# EAGLE board smd_circuit_50x50 (EAGLE 5.11)
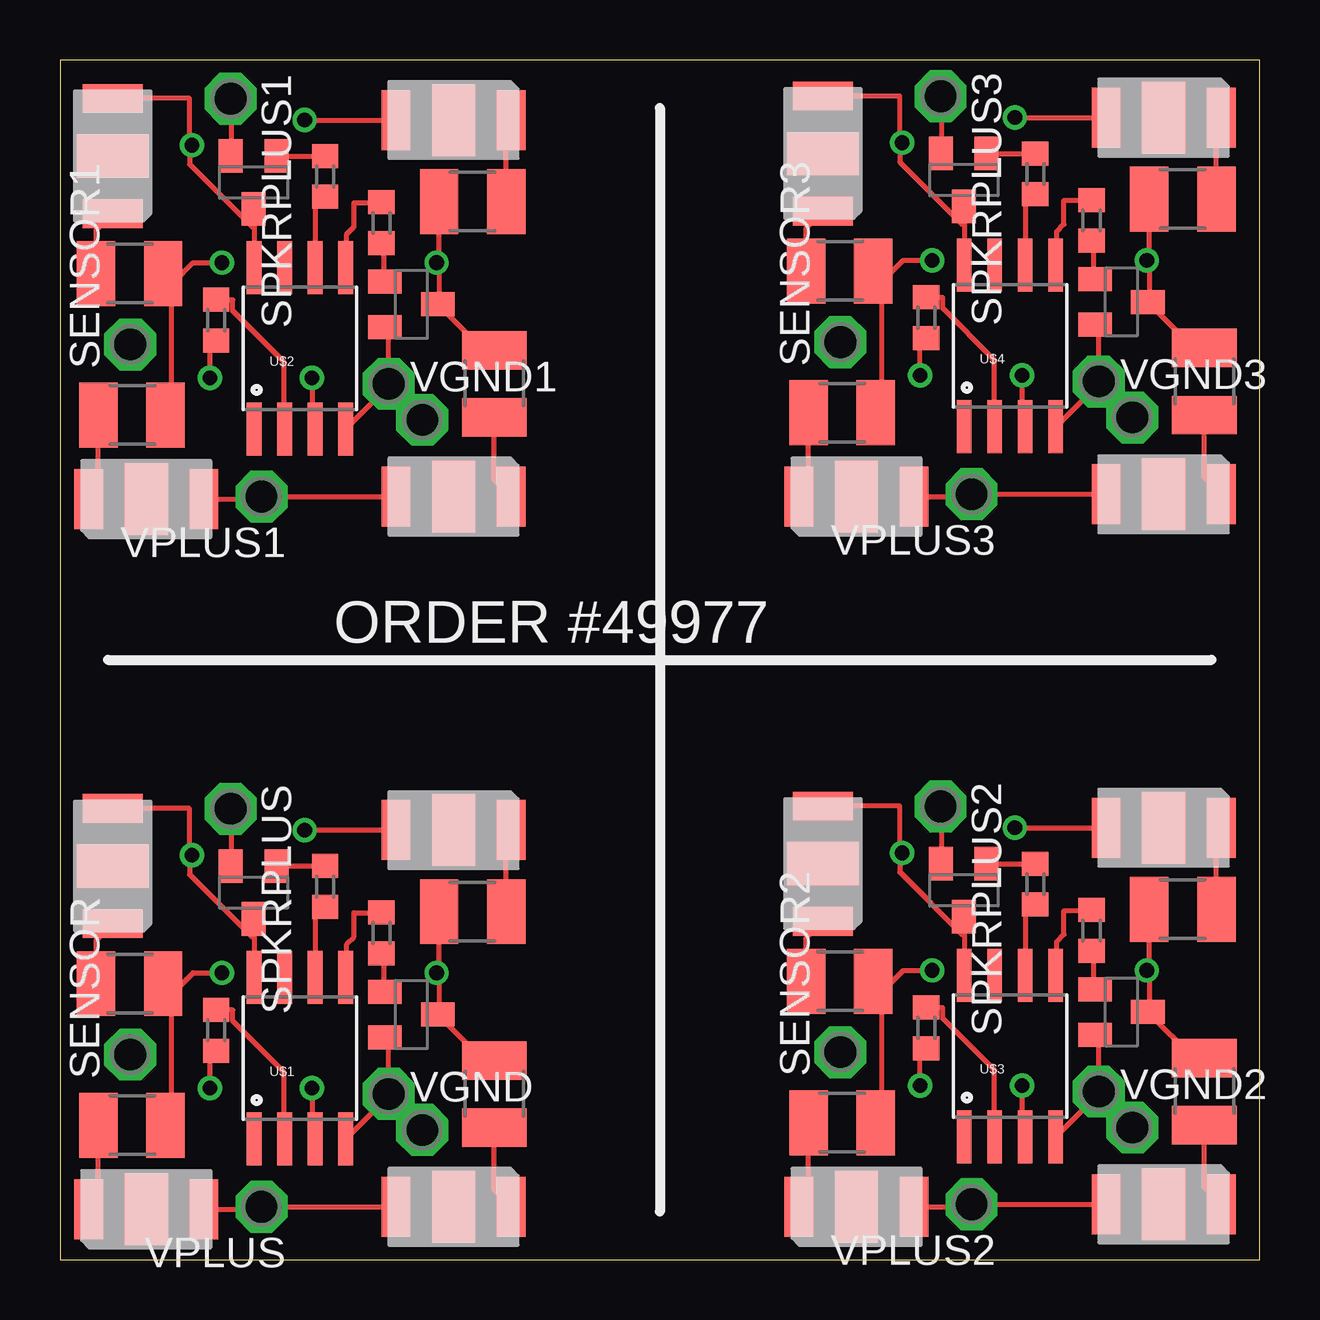
[diagram p0: board, top side]
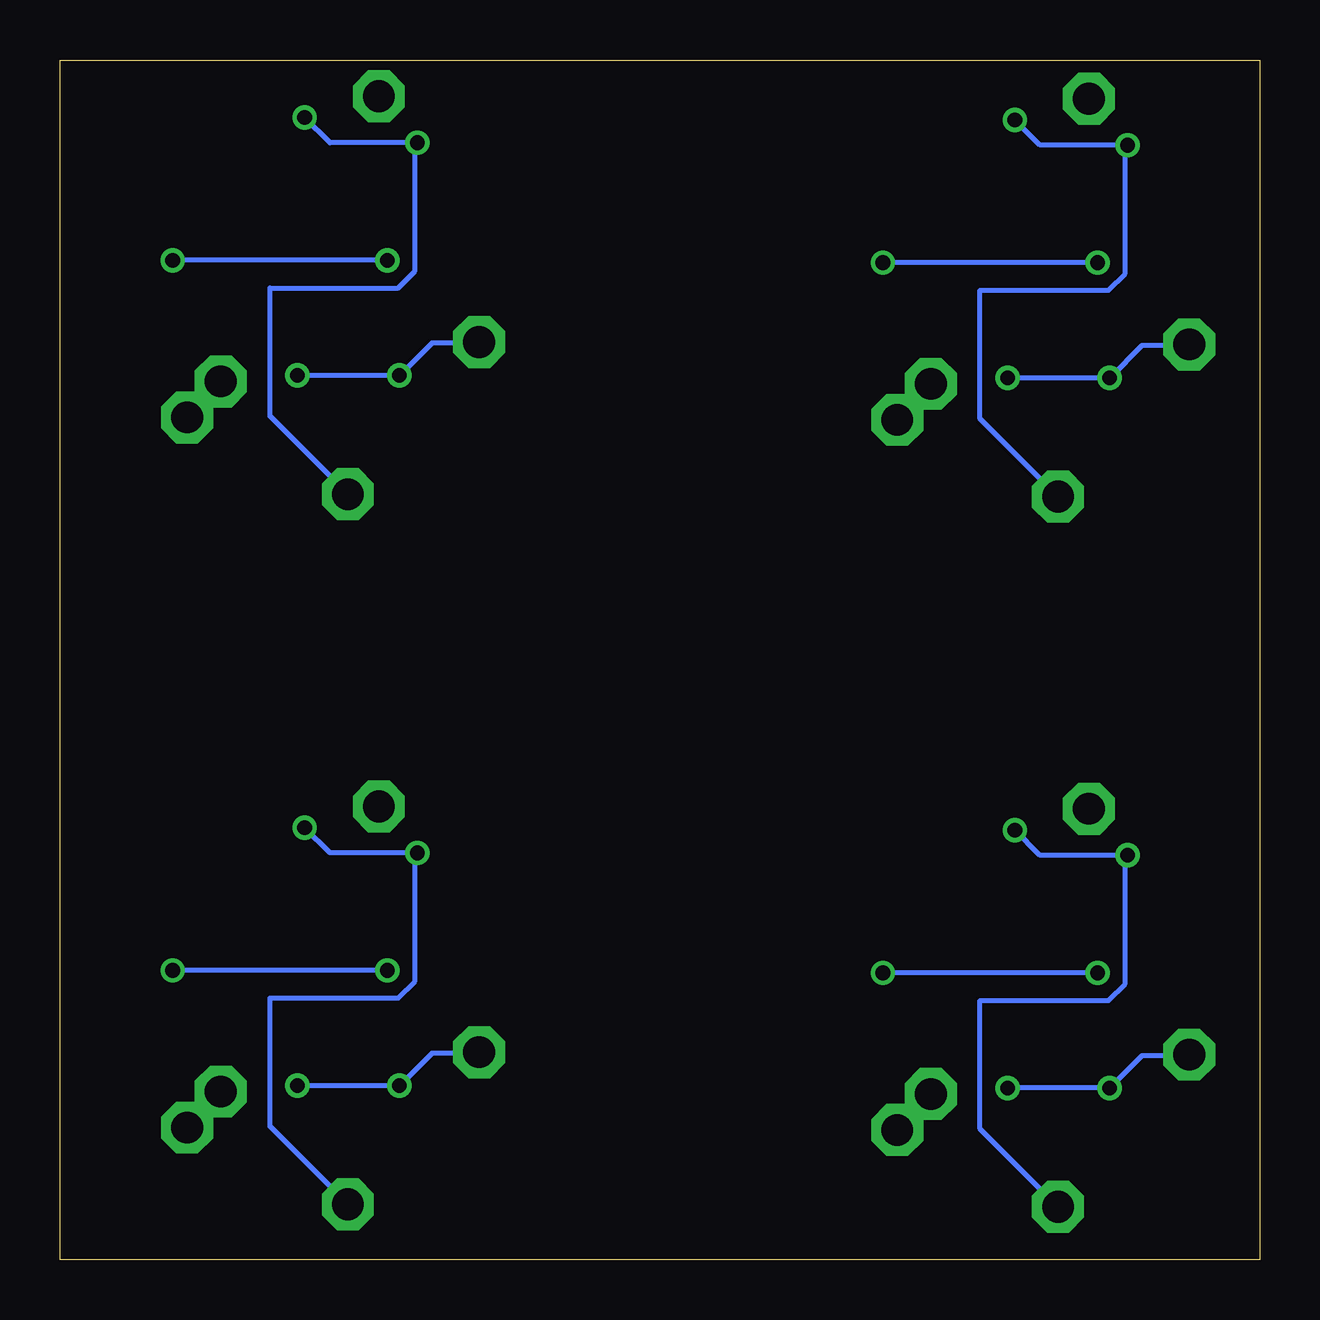
[diagram p1: board, bottom side, seen from below]

Size 50 x 50 mm. Coordinates in mm from the lower left corner, seen from the top.
Outline: 0,0 50,0 50,50 0,50 0,0
Copper layers (1*16): Top 0.035mm / dielectric 1.5mm / Bottom 0.035mm
Design rules "default *": minimum track width 8mil, minimum drill 24mil, track to track 20mil, track to pad 20mil, pad to pad 20mil, via to via 20mil, smd to smd 20mil, copper to edge 7mil, drill to drill 8mil, minimum pad ring 10mil, minimum via ring 8mil, stop-mask expansion 4mil, vias tented up to drill 0mil, thermal gap 10mil

## Footprints (pad centres in the part's own frame; a part is rotated, then mirrored left to right if it is on the bottom)
OPTEK-DURIS5 = smd 2.5 x 1.2: ANODE 0,-2.4; CATHODE 0,2.4 | smd 3 x 1.8: P$5 0,0
R0603 = smd 1 x 1.1: 1 -0.85,0; 2 0.85,0
R1210 = smd 1.6 x 2.7: 1 -1.4,0; 2 1.4,0
P1-13 = drill 1.321 pad 2.159 octagon: TP 0,0
SOT23-BEC = smd 1 x 1.4: B -0.95,-1.1; C 0,1.1; E 0.95,-1.1
SO08-EIAJ = smd 0.61 x 2.21: 1 -1.905,-3.378; 2 -0.635,-3.378; 3 0.635,-3.378; 4 1.905,-3.378; 5 1.905,3.353; 6 0.635,3.353; 7 -0.635,3.353; 8 -1.905,3.353

## Placement (x,y rotation side)
LED1  [OPTEK-DURIS5]  16.4,17.9 270 top
LED2  [OPTEK-DURIS5]  16.4,2.2 270 top
LED3  [OPTEK-DURIS5]  3.6,2.1 90 top
LED4  [OPTEK-DURIS5]  2.2,16.4 180 top
LED5  [OPTEK-DURIS5]  16.4,47.5 270 top
LED6  [OPTEK-DURIS5]  16.4,31.8 270 top
LED7  [OPTEK-DURIS5]  3.6,31.7 90 top
LED8  [OPTEK-DURIS5]  2.2,46 180 top
LED9  [OPTEK-DURIS5]  46,18 270 top
LED10  [OPTEK-DURIS5]  46,2.3 270 top
LED11  [OPTEK-DURIS5]  33.2,2.2 90 top
LED12  [OPTEK-DURIS5]  31.8,16.5 180 top
LED13  [OPTEK-DURIS5]  46,47.6 270 top
LED14  [OPTEK-DURIS5]  46,31.9 270 top
LED15  [OPTEK-DURIS5]  33.2,31.8 90 top
LED16  [OPTEK-DURIS5]  31.8,46.1 180 top
R1  [R0603]  13.4,13.61 270 top
R2  [R0603]  11.05,15.55 90 top
R3  [R0603]  6.51,9.56 90 top
R4  [R1210]  17.2,14.5 180 top
R5  [R1210]  18.1,6.9 90 top
R6  [R1210]  3,5.6 0 top
R7  [R1210]  2.9,11.5 0 top
R8  [R0603]  13.4,43.21 270 top
R9  [R0603]  11.05,45.15 90 top
R10  [R0603]  6.51,39.16 90 top
R11  [R1210]  17.2,44.1 180 top
R12  [R1210]  18.1,36.5 90 top
R13  [R1210]  3,35.2 0 top
R14  [R1210]  2.9,41.1 0 top
R15  [R0603]  43,13.71 270 top
R16  [R0603]  40.65,15.65 90 top
R17  [R0603]  36.11,9.66 90 top
R18  [R1210]  46.8,14.6 180 top
R19  [R1210]  47.7,7 90 top
R20  [R1210]  32.6,5.7 0 top
R21  [R1210]  32.5,11.6 0 top
R22  [R0603]  43,43.31 270 top
R23  [R0603]  40.65,45.25 90 top
R24  [R0603]  36.11,39.26 90 top
R25  [R1210]  46.8,44.2 180 top
R26  [R1210]  47.7,36.6 90 top
R27  [R1210]  32.6,35.3 0 top
R28  [R1210]  32.5,41.2 0 top
SENSOR  PTR1PAD1-13  [P1-13]  2.93,8.54 90 top
SENSOR1  PTR1PAD1-13  [P1-13]  2.93,38.14 90 top
SENSOR2  PTR1PAD1-13  [P1-13]  32.53,8.64 90 top
SENSOR3  PTR1PAD1-13  [P1-13]  32.53,38.24 90 top
SPKRGND  PTR1PAD1-13  [P1-13]  15.1,5.4 0 top
SPKRGND1  PTR1PAD1-13  [P1-13]  15.1,35 0 top
SPKRGND2  PTR1PAD1-13  [P1-13]  44.7,5.5 0 top
SPKRGND3  PTR1PAD1-13  [P1-13]  44.7,35.1 0 top
SPKRPLUS  PTR1PAD1-13  [P1-13]  7.11,18.79 270 top
SPKRPLUS1  PTR1PAD1-13  [P1-13]  7.11,48.39 270 top
SPKRPLUS2  PTR1PAD1-13  [P1-13]  36.71,18.89 270 top
SPKRPLUS3  PTR1PAD1-13  [P1-13]  36.71,48.49 270 top
T1  [SOT23-BEC]  14.64,10.21 270 top
T2  [SOT23-BEC]  8.07,15.3 180 top
T3  [SOT23-BEC]  14.64,39.81 270 top
T4  [SOT23-BEC]  8.07,44.9 180 top
T5  [SOT23-BEC]  44.24,10.31 270 top
T6  [SOT23-BEC]  37.67,15.4 180 top
T7  [SOT23-BEC]  44.24,39.91 270 top
T8  [SOT23-BEC]  37.67,45 180 top
U$1  ATTINY45  [SO08-EIAJ]  10,8.4 0 top
U$2  ATTINY45  [SO08-EIAJ]  10,38 0 top
U$3  ATTINY45  [SO08-EIAJ]  39.6,8.5 0 top
U$4  ATTINY45  [SO08-EIAJ]  39.6,38.1 0 top
VGND  PTR1PAD1-13  [P1-13]  13.7,6.9 0 top
VGND1  PTR1PAD1-13  [P1-13]  13.7,36.5 0 top
VGND2  PTR1PAD1-13  [P1-13]  43.3,7 0 top
VGND3  PTR1PAD1-13  [P1-13]  43.3,36.6 0 top
VPLUS  PTR1PAD1-13  [P1-13]  8.4,2.2 180 top
VPLUS1  PTR1PAD1-13  [P1-13]  8.4,31.8 180 top
VPLUS2  PTR1PAD1-13  [P1-13]  38,2.3 180 top
VPLUS3  PTR1PAD1-13  [P1-13]  38,31.9 180 top

## Library data of the parts
LED1-LED16 T1-T8 = smd_parts
R1-R28 = rcl
SENSOR SENSOR1-SENSOR3 SPKRGND SPKRGND1-SPKRGND3 SPKRPLUS SPKRPLUS1-SPKRPLUS3 VGND VGND1-VGND3 VPLUS VPLUS1-VPLUS3 = testpad
U$1-U$4 = SparkFun

## Nets
+5V: LED1.ANODE LED2.ANODE LED3.ANODE LED4.ANODE T2.C U$1.8 VPLUS.TP
+5V1: LED5.ANODE LED6.ANODE LED7.ANODE LED8.ANODE T4.C U$2.8 VPLUS1.TP
+5V2: LED9.ANODE LED10.ANODE LED11.ANODE LED12.ANODE T6.C U$3.8 VPLUS2.TP
+5V3: LED13.ANODE LED14.ANODE LED15.ANODE LED16.ANODE T8.C U$4.8 VPLUS3.TP
GNDA: SPKRGND.TP T1.E U$1.4 VGND.TP
GNDA1: SPKRGND1.TP T3.E U$2.4 VGND1.TP
GNDA2: SPKRGND2.TP T5.E U$3.4 VGND2.TP
GNDA3: SPKRGND3.TP T7.E U$4.4 VGND3.TP
N$1: R3.2 U$1.2
N$2: R10.2 U$2.2
N$3: R2.1 U$1.6
N$4: R2.2 T2.B
N$5: R4.2 R5.2 R6.2 R7.2 T1.C
N$6: R1.2 T1.B
N$7: R1.1 U$1.5
N$8: SPKRPLUS.TP T2.E
N$9: LED1.CATHODE R4.1
N$10: LED2.CATHODE R5.1
N$11: LED3.CATHODE R6.1
N$12: LED4.CATHODE R7.1
N$13: R9.1 U$2.6
N$14: R8.1 U$2.5
N$15: R9.2 T4.B
N$16: SPKRPLUS1.TP T4.E
N$17: LED5.CATHODE R11.1
N$18: LED6.CATHODE R12.1
N$19: R3.1 SENSOR.TP U$1.3
N$20: LED7.CATHODE R13.1
N$21: LED8.CATHODE R14.1
N$22: R8.2 T3.B
N$23: R11.2 R12.2 R13.2 R14.2 T3.C
N$24: R10.1 SENSOR1.TP U$2.3
N$25: R17.2 U$3.2
N$26: R16.1 U$3.6
N$27: R15.1 U$3.5
N$28: R16.2 T6.B
N$29: SPKRPLUS2.TP T6.E
N$30: LED9.CATHODE R18.1
N$31: LED10.CATHODE R19.1
N$32: LED11.CATHODE R20.1
N$33: LED12.CATHODE R21.1
N$34: R15.2 T5.B
N$35: R18.2 R19.2 R20.2 R21.2 T5.C
N$36: R17.1 SENSOR2.TP U$3.3
N$37: R24.2 U$4.2
N$38: R23.1 U$4.6
N$39: R22.1 U$4.5
N$40: R23.2 T8.B
N$41: SPKRPLUS3.TP T8.E
N$42: LED13.CATHODE R25.1
N$43: LED14.CATHODE R26.1
N$44: LED15.CATHODE R27.1
N$45: LED16.CATHODE R28.1
N$46: R22.2 T7.B
N$47: R25.2 R26.2 R27.2 R28.2 T7.C
N$48: R24.1 SENSOR3.TP U$4.3

## Tracks (layer width: path | path; a pad name or v marks a point on that pad's centre or on a via)
+5V  (via drill 0.61)
  Top 0.203: LED3.ANODE 8.4,2.1 VPLUS.TP LED2.ANODE | 8.1,13.45 8.1,11.8 U$1.8 | 8.1,13.45 8.1,14.15 T2.C | LED4.ANODE 5.4,18.8 5.4,16.85 | 5.4,16.85 5.4,16.05 8,13.45 8.1,13.45 | v10.2,17.9 LED1.ANODE | v5.5,16.85 5.4,16.85
  Bottom 0.203: v10.2,17.9 9.15,16.85 v5.5,16.85 5.6,16.75 5.6,11.5 6.3,10.8 11.65,10.8 11.65,5.45 VPLUS.TP
+5V1  (via drill 0.61)
  Top 0.203: LED7.ANODE 8.4,31.7 VPLUS1.TP LED6.ANODE | 8.1,43.05 8.1,41.4 U$2.8 | 8.1,43.05 8.1,43.75 T4.C | LED8.ANODE 5.4,48.4 5.4,46.45 | 5.4,46.45 5.4,45.65 8,43.05 8.1,43.05 | v10.2,47.5 LED5.ANODE | v5.5,46.45 5.4,46.45
  Bottom 0.203: v10.2,47.5 9.15,46.45 v5.5,46.45 5.6,46.35 5.6,41.1 6.3,40.4 11.65,40.4 11.65,35.05 VPLUS1.TP
+5V2  (via drill 0.61)
  Top 0.203: LED11.ANODE 38,2.2 VPLUS2.TP LED10.ANODE | 37.7,13.55 37.7,11.9 U$3.8 | 37.7,13.55 37.7,14.25 T6.C | LED12.ANODE 35,18.9 35,16.95 | 35,16.95 35,16.15 37.6,13.55 37.7,13.55 | v39.8,18 LED9.ANODE | v35.1,16.95 35,16.95
  Bottom 0.203: v39.8,18 38.75,16.95 v35.1,16.95 35.2,16.85 35.2,11.6 35.9,10.9 41.25,10.9 41.25,5.55 VPLUS2.TP
+5V3  (via drill 0.61)
  Top 0.203: LED15.ANODE 38,31.8 VPLUS3.TP LED14.ANODE | 37.7,43.15 37.7,41.5 U$4.8 | 37.7,43.15 37.7,43.85 T8.C | LED16.ANODE 35,48.5 35,46.55 | 35,46.55 35,45.75 37.6,43.15 37.7,43.15 | v39.8,47.6 LED13.ANODE | v35.1,46.55 35,46.55
  Bottom 0.203: v39.8,47.6 38.75,46.55 v35.1,46.55 35.2,46.45 35.2,41.2 35.9,40.5 41.25,40.5 41.25,35.15 VPLUS3.TP
GNDA
  Top 0.203: VGND.TP 13.7,9.1 T1.E | U$1.4 11.95,5.05 13.7,6.8 VGND.TP | SPKRGND.TP 13.75,6.75 VGND.TP
GNDA1
  Top 0.203: VGND1.TP 13.7,38.7 T3.E | U$2.4 11.95,34.65 13.7,36.4 VGND1.TP | SPKRGND1.TP 13.75,36.35 VGND1.TP
GNDA2
  Top 0.203: VGND2.TP 43.3,9.2 T5.E | U$3.4 41.55,5.15 43.3,6.9 VGND2.TP | SPKRGND2.TP 43.35,6.85 VGND2.TP
GNDA3
  Top 0.203: VGND3.TP 43.3,38.8 T7.E | U$4.4 41.55,34.75 43.3,36.5 VGND3.TP | SPKRGND3.TP 43.35,36.45 VGND3.TP
N$1
  Top 0.203: R3.2 6.55,10.4 7.2,10.4 7.2,9.95 9.35,7.8 9.35,5.05 U$1.2
N$2
  Top 0.203: R10.2 6.55,40 7.2,40 7.2,39.55 9.35,37.4 9.35,34.65 U$2.2
N$3
  Top 0.203: R2.1 11.05,14.65 10.65,14.25 10.65,11.8 U$1.6
N$4
  Top 0.203: R2.2 9.05,16.4 T2.B
N$5  (via drill 0.61)
  Top 0.203: R6.2 4.65,5.85 4.65,11.15 R7.2 4.75,11.15 5.55,11.95 v6.75,11.95 | R5.2 17.65,8.3 T1.C 15.8,10.3 15.8,11.95 | 15.8,11.95 R4.2 | v15.7,11.95 15.8,11.95
  Bottom 0.203: v6.75,11.95 v15.7,11.95
N$6
  Top 0.203: R1.2 13.5,12.65 13.5,11.2 T1.B
N$7
  Top 0.203: R1.1 13.35,14.45 12.25,14.45 12.25,13.45 11.95,13.15 11.95,11.8 U$1.5
N$8
  Top 0.203: T2.E 7.15,16.4 7.15,18.55 SPKRPLUS.TP
N$9
  Top 0.203: LED1.CATHODE 18.6,17.7 R4.1
N$10
  Top 0.203: LED2.CATHODE 18.1,2.9 R5.1
N$11
  Top 0.203: LED3.CATHODE 1.6,2.5 R6.1
N$12
  Top 0.203: LED4.CATHODE 1.5,13.3 R7.1
N$13
  Top 0.203: R9.1 11.05,44.25 10.65,43.85 10.65,41.4 U$2.6
N$14
  Top 0.203: R8.1 13.35,44.05 12.25,44.05 12.25,43.05 11.95,42.75 11.95,41.4 U$2.5
N$15
  Top 0.203: R9.2 9.05,46 T4.B
N$16
  Top 0.203: T4.E 7.15,46 7.15,48.15 SPKRPLUS1.TP
N$17
  Top 0.203: LED5.CATHODE 18.6,47.3 R11.1
N$18
  Top 0.203: LED6.CATHODE 18.1,32.5 R12.1
N$19  (via drill 0.61)
  Top 0.203: v6.25,7.15 6.25,8.45 R3.1 | v10.5,7.15 10.5,5.15 10.6,5.05 U$1.3
  Bottom 0.203: SENSOR.TP 2.95,8.5 4.9,8.5 v6.25,7.15 v10.5,7.15
N$20
  Top 0.203: LED7.CATHODE 1.6,32.1 R13.1
N$21
  Top 0.203: LED8.CATHODE 1.5,42.9 R14.1
N$22
  Top 0.203: R8.2 13.5,42.25 13.5,40.8 T3.B
N$23  (via drill 0.61)
  Top 0.203: R13.2 4.65,35.45 4.65,40.75 R14.2 4.75,40.75 5.55,41.55 v6.75,41.55 | R12.2 17.65,37.9 T3.C 15.8,39.9 15.8,41.55 | 15.8,41.55 R11.2 | v15.7,41.55 15.8,41.55
  Bottom 0.203: v6.75,41.55 v15.7,41.55
N$24  (via drill 0.61)
  Top 0.203: v6.25,36.75 6.25,38.05 R10.1 | v10.5,36.75 10.5,34.75 10.6,34.65 U$2.3
  Bottom 0.203: SENSOR1.TP 2.95,38.1 4.9,38.1 v6.25,36.75 v10.5,36.75
N$25
  Top 0.203: R17.2 36.15,10.5 36.8,10.5 36.8,10.05 38.95,7.9 38.95,5.15 U$3.2
N$26
  Top 0.203: R16.1 40.65,14.75 40.25,14.35 40.25,11.9 U$3.6
N$27
  Top 0.203: R15.1 42.95,14.55 41.85,14.55 41.85,13.55 41.55,13.25 41.55,11.9 U$3.5
N$28
  Top 0.203: R16.2 38.65,16.5 T6.B
N$29
  Top 0.203: T6.E 36.75,16.5 36.75,18.65 SPKRPLUS2.TP
N$30
  Top 0.203: LED9.CATHODE 48.2,17.8 R18.1
N$31
  Top 0.203: LED10.CATHODE 47.7,3 R19.1
N$32
  Top 0.203: LED11.CATHODE 31.2,2.6 R20.1
N$33
  Top 0.203: LED12.CATHODE 31.1,13.4 R21.1
N$34
  Top 0.203: R15.2 43.1,12.75 43.1,11.3 T5.B
N$35  (via drill 0.61)
  Top 0.203: R20.2 34.25,5.95 34.25,11.25 R21.2 34.35,11.25 35.15,12.05 v36.35,12.05 | R19.2 47.25,8.4 T5.C 45.4,10.4 45.4,12.05 | 45.4,12.05 R18.2 | v45.3,12.05 45.4,12.05
  Bottom 0.203: v36.35,12.05 v45.3,12.05
N$36  (via drill 0.61)
  Top 0.203: v35.85,7.25 35.85,8.55 R17.1 | v40.1,7.25 40.1,5.25 40.2,5.15 U$3.3
  Bottom 0.203: SENSOR2.TP 32.55,8.6 34.5,8.6 v35.85,7.25 v40.1,7.25
N$37
  Top 0.203: R24.2 36.15,40.1 36.8,40.1 36.8,39.65 38.95,37.5 38.95,34.75 U$4.2
N$38
  Top 0.203: R23.1 40.65,44.35 40.25,43.95 40.25,41.5 U$4.6
N$39
  Top 0.203: R22.1 42.95,44.15 41.85,44.15 41.85,43.15 41.55,42.85 41.55,41.5 U$4.5
N$40
  Top 0.203: R23.2 38.65,46.1 T8.B
N$41
  Top 0.203: T8.E 36.75,46.1 36.75,48.25 SPKRPLUS3.TP
N$42
  Top 0.203: LED13.CATHODE 48.2,47.4 R25.1
N$43
  Top 0.203: LED14.CATHODE 47.7,32.6 R26.1
N$44
  Top 0.203: LED15.CATHODE 31.2,32.2 R27.1
N$45
  Top 0.203: LED16.CATHODE 31.1,43 R28.1
N$46
  Top 0.203: R22.2 43.1,42.35 43.1,40.9 T7.B
N$47  (via drill 0.61)
  Top 0.203: R27.2 34.25,35.55 34.25,40.85 R28.2 34.35,40.85 35.15,41.65 v36.35,41.65 | R26.2 47.25,38 T7.C 45.4,40 45.4,41.65 | 45.4,41.65 R25.2 | v45.3,41.65 45.4,41.65
  Bottom 0.203: v36.35,41.65 v45.3,41.65
N$48  (via drill 0.61)
  Top 0.203: v35.85,36.85 35.85,38.15 R24.1 | v40.1,36.85 40.1,34.85 40.2,34.75 U$4.3
  Bottom 0.203: SENSOR3.TP 32.55,38.2 34.5,38.2 v35.85,36.85 v40.1,36.85

## Text on the board
tNames: ORDER #49977